# EAGLE board ATtinyBoard_2 (EAGLE 6.4)
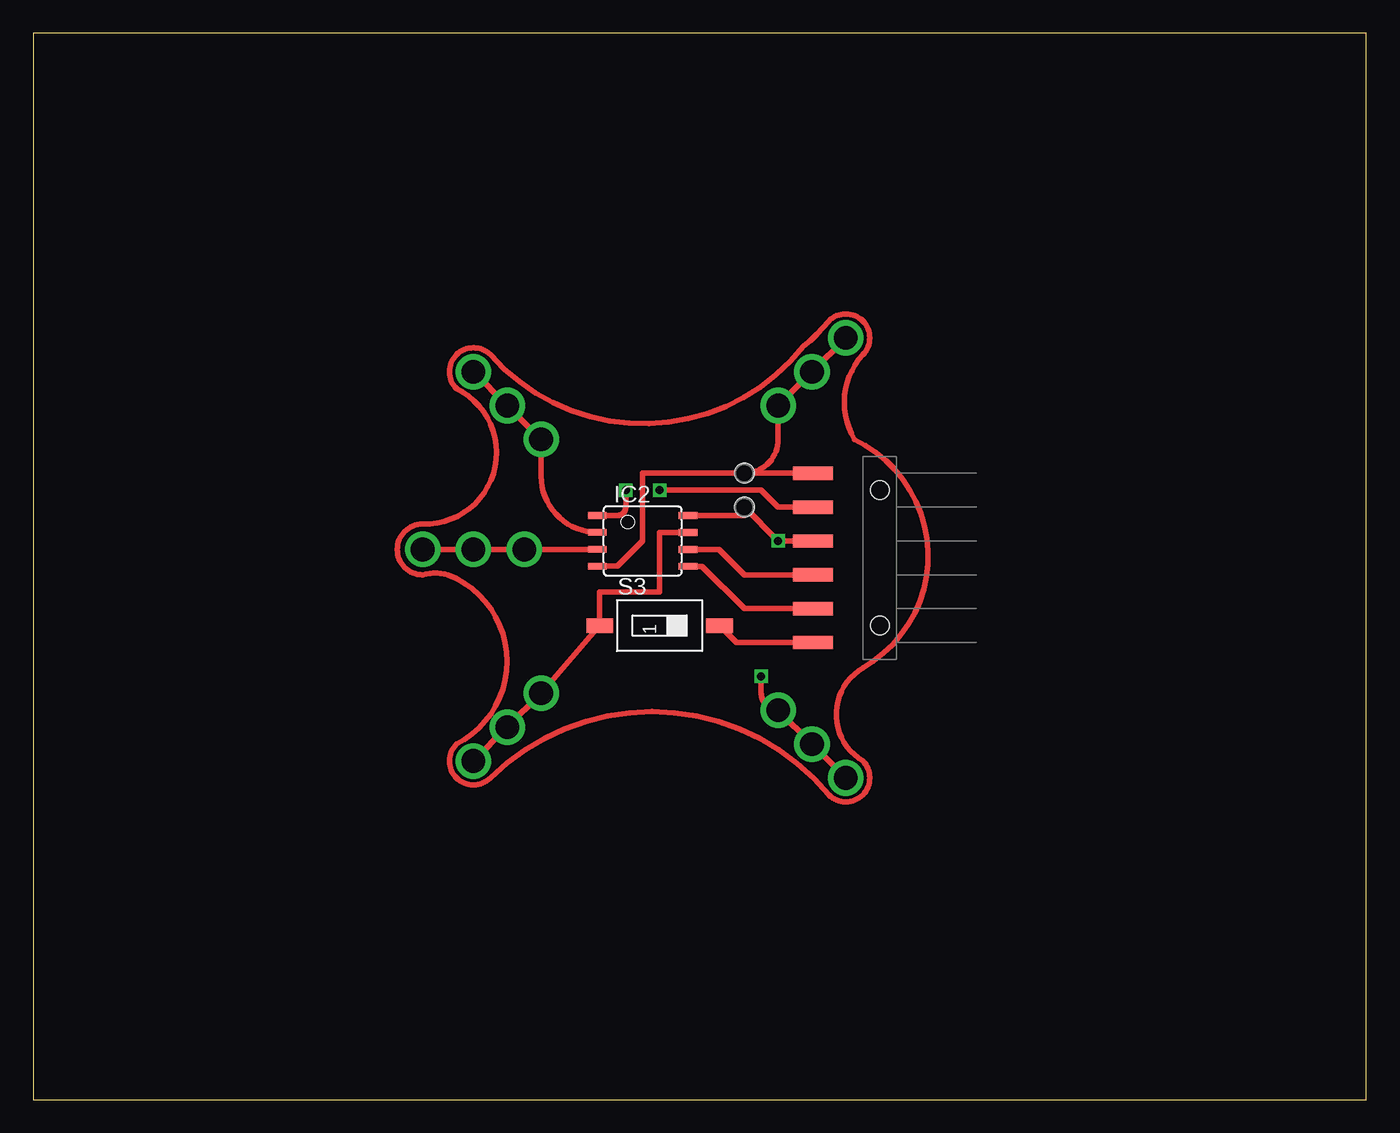
[diagram p0: board, top side]
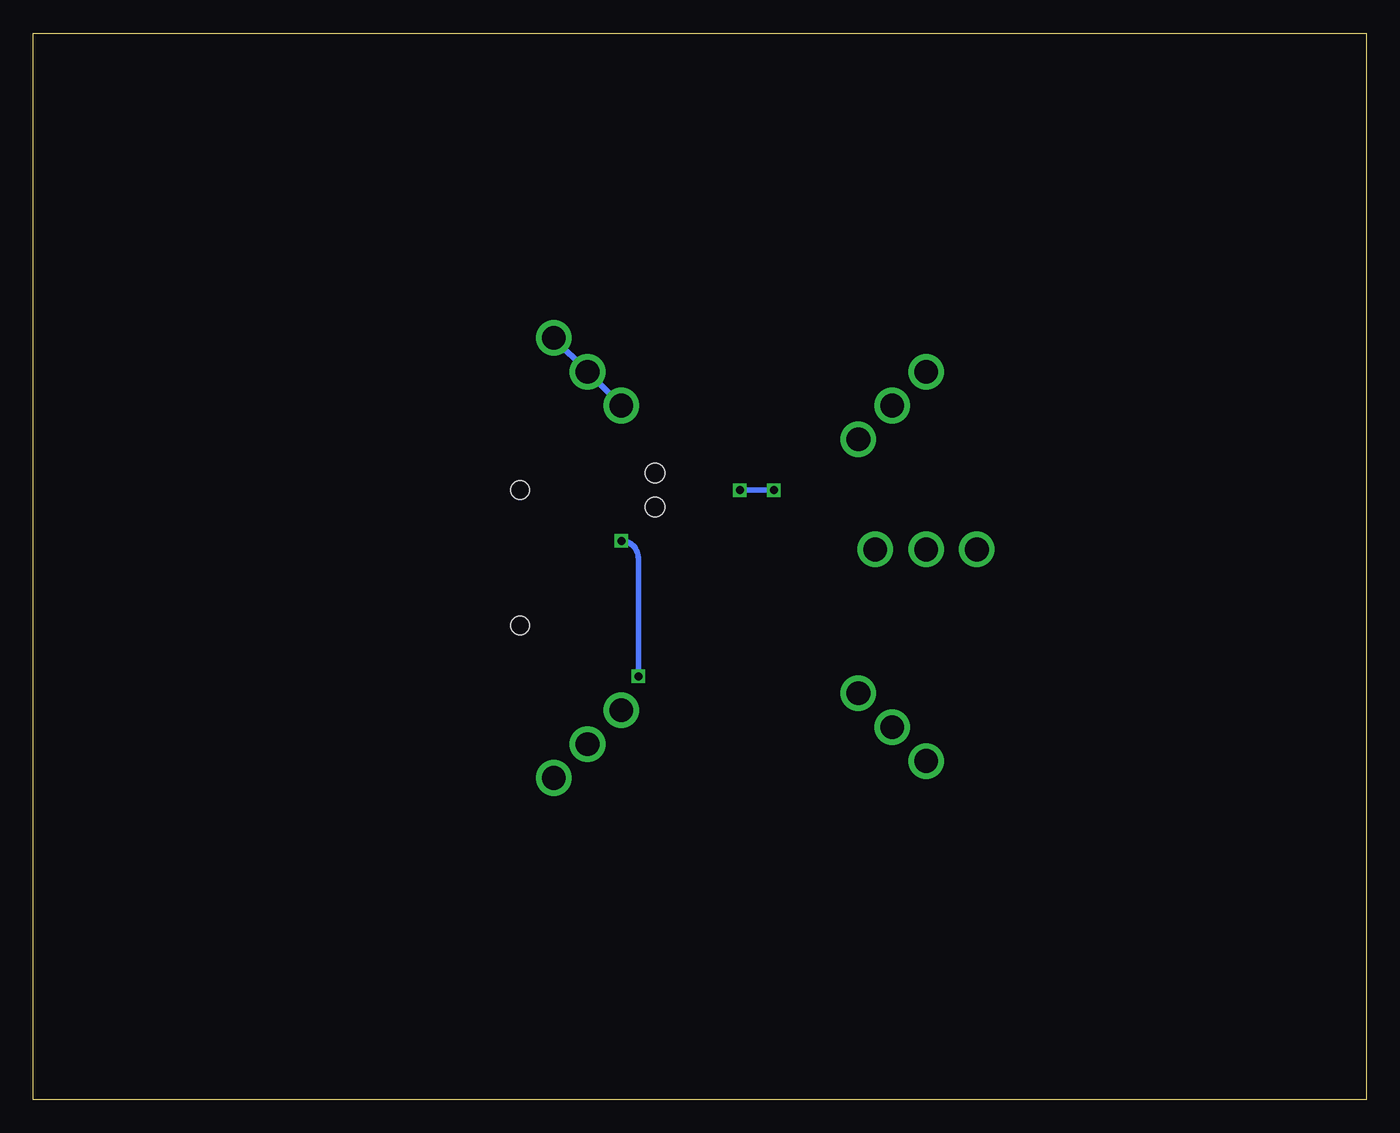
[diagram p1: board, bottom side, seen from below]

Size 100 x 80 mm. Coordinates in mm from the lower left corner, seen from the top.
Outline: 0,0 100,0 100,80 0,80 0,0
Copper layers (1*16): Top 0.035mm / dielectric 1.5mm / Bottom 0.035mm
Design rules "default": minimum track width 10mil, minimum drill 24mil, track to track 8mil, track to pad 8mil, pad to pad 8mil, via to via 8mil, smd to smd 8mil, copper to edge 40mil, drill to drill 8mil, minimum pad ring 10mil, minimum via ring 8mil, stop-mask expansion 4mil, vias tented up to drill 0mil, thermal gap 10mil

## Footprints (pad centres in the part's own frame; a part is rotated, then mirrored left to right if it is on the bottom)
SIMPLE_HOLE_SM = drill 1.778 pad 2.286: P$1 0,0
8S2 = smd 0.5 x 1.4: 1 -1.905,-3.404; 2 -0.645,-3.404; 3 0.625,-3.404; 4 1.895,-3.404; 5 1.905,3.404; 6 0.635,3.404; 7 -0.635,3.404; 8 -1.905,3.404
1X06-SMD = smd 1 x 3: 1 -6.35,5; 2 -3.81,5; 3 -1.27,5; 4 1.27,5; 5 3.81,5; 6 6.35,5 | hole 1.4: -5.08,0; 5.08,0
1X02_PP_HOLES_ONLY = drill 0.889 pad 0.813: 1 0,0; 2 2.54,0 | hole 1.473: 0,0; 2.54,0
SMS-001 = smd 1.092 x 2.007: 1 0,-4.496; 2 0,4.496

## Placement (x,y rotation side)
H1  SEW_HOLE-SMALL  [SIMPLE_HOLE_SM]  38.1,30.48 0 top
H2  SEW_HOLE-SMALL  [SIMPLE_HOLE_SM]  38.1,49.53 0 top
H3  SEW_HOLE-SMALL  [SIMPLE_HOLE_SM]  36.83,41.27 0 top
H4  SEW_HOLE-SMALL  [SIMPLE_HOLE_SM]  55.88,52.07 0 top
H5  SEW_HOLE-SMALL  [SIMPLE_HOLE_SM]  55.88,29.21 0 top
H6  SEW_HOLE-SMALL  [SIMPLE_HOLE_SM]  58.42,26.67 0 top
H7  SEW_HOLE-SMALL  [SIMPLE_HOLE_SM]  60.96,24.13 0 top
H8  SEW_HOLE-SMALL  [SIMPLE_HOLE_SM]  33.02,41.27 0 top
H9  SEW_HOLE-SMALL  [SIMPLE_HOLE_SM]  29.21,41.27 0 top
H10  SEW_HOLE-SMALL  [SIMPLE_HOLE_SM]  35.56,52.07 0 top
H11  SEW_HOLE-SMALL  [SIMPLE_HOLE_SM]  33.02,54.61 0 top
H12  SEW_HOLE-SMALL  [SIMPLE_HOLE_SM]  35.56,27.94 0 top
H13  SEW_HOLE-SMALL  [SIMPLE_HOLE_SM]  33.02,25.4 0 top
H14  SEW_HOLE-SMALL  [SIMPLE_HOLE_SM]  58.42,54.61 0 top
H15  SEW_HOLE-SMALL  [SIMPLE_HOLE_SM]  60.96,57.15 0 top
IC2  TINY13-20SU  [8S2]  45.72,41.91 270 top
ISP/FTDI-CONNECTOR  [1X06-SMD]  63.5,40.64 90 top
JP2  M02POGO_PIN_HOLES_ONLY  [1X02_PP_HOLES_ONLY]  53.34,46.99 270 top
S3  SWS001  [SMS-001]  46.99,35.56 270 top

## Library data of the parts
H1-H15 = LilyPad-Wearables
IC2 = atmel; MPN: ATTINY13-20SU; OC_FARNELL: 9171568; OC_NEWARK: 96K6522
ISP/FTDI-CONNECTOR JP2 = SparkFun-Connectors
S3 = smd-special

## Nets
GND: H4.P$1 H14.P$1 H15.P$1 IC2.4 ISP/FTDI-CONNECTOR.6 JP2.1
N$1: IC2.5 ISP/FTDI-CONNECTOR.2
N$2: H3.P$1 H8.P$1 H9.P$1 IC2.3
N$3: IC2.1 ISP/FTDI-CONNECTOR.5
N$4: IC2.6 ISP/FTDI-CONNECTOR.3
N$5: ISP/FTDI-CONNECTOR.1 S3.2
N$6: H2.P$1 H10.P$1 H11.P$1 IC2.2
N$7: H5.P$1 H6.P$1 H7.P$1 IC2.8 ISP/FTDI-CONNECTOR.4 JP2.2
N$8: H1.P$1 H12.P$1 H13.P$1 IC2.7 S3.1

## Tracks (layer width: path | path; a pad name or v marks a point on that pad's centre or on a via)
GND
  Top 0.406: JP2.1 45.72,46.99 45.72,41.91 43.83,40.02 IC2.4 | JP2.1 ISP/FTDI-CONNECTOR.6 | JP2.1 arc90 55.88,49.53 H4.P$1 H14.P$1 H15.P$1
  Bottom 0.406: H15.P$1 H14.P$1 H4.P$1
N$1
  Top 0.406: IC2.5 50.16,40.01 53.34,36.83 ISP/FTDI-CONNECTOR.2
N$2
  Top 0.406: IC2.3 H3.P$1 H8.P$1 H9.P$1
N$3  (via drill 0.6)
  Top 0.406: IC2.1 43.81,43.81 arc90 44.45,44.45 v44.45,45.72 | ISP/FTDI-CONNECTOR.5 55.88,44.45 54.61,45.72 v46.99,45.72
  Bottom 0.406: v46.99,45.72 v44.45,45.72
N$4
  Top 0.406: IC2.6 51.44,41.27 53.34,39.37 ISP/FTDI-CONNECTOR.3
N$5
  Top 0.406: S3.2 52.76,34.29 ISP/FTDI-CONNECTOR.1
N$6
  Top 0.406: IC2.2 arc-90 38.1,46.77 H2.P$1 H10.P$1 H11.P$1
N$7  (via drill 0.6)
  Top 0.406: IC2.8 53.34,43.81 JP2.2 v55.88,41.91 ISP/FTDI-CONNECTOR.4 | H7.P$1 H6.P$1 H5.P$1 arc-90 54.61,30.48 v54.61,31.75
  Bottom 0.406: v54.61,31.75 54.61,40.64 arc-90 v55.88,41.91
N$8
  Top 0.406: IC2.7 46.99,42.55 46.99,38.1 42.49,38.1 S3.1 H1.P$1 H12.P$1 H13.P$1
N$9  (via drill 0.6)
  other vias: 54.61,31.75
N$10
  Top 0.406: 62.23,25.4 arc-180 59.69,22.86 arc95 34.29,24.13 arc-180 31.75,26.67 arc131 31.11,39.37 arc31 29.21,39.37 arc-180 29.21,43.18 arc156 31.75,53.34 arc-180 34.29,55.88 arc100 57.78,56.52 arc13 59.69,58.42 arc-180 62.23,55.88 arc73 61.59,49.53 arc-125 62.23,32.38 arc118 62.23,25.4